# Altium PCB PCB1.PcbDoc (part 3 of 3)
Units mm, origin at the board's own origin, x right, y up, seen from the top; angles counter-clockwise.
Board outline 21.72 x 226.57 mm, 2 copper layers (Top Layer, Bottom Layer); 37 components, 26 nets, 124 pads, 11 vias.
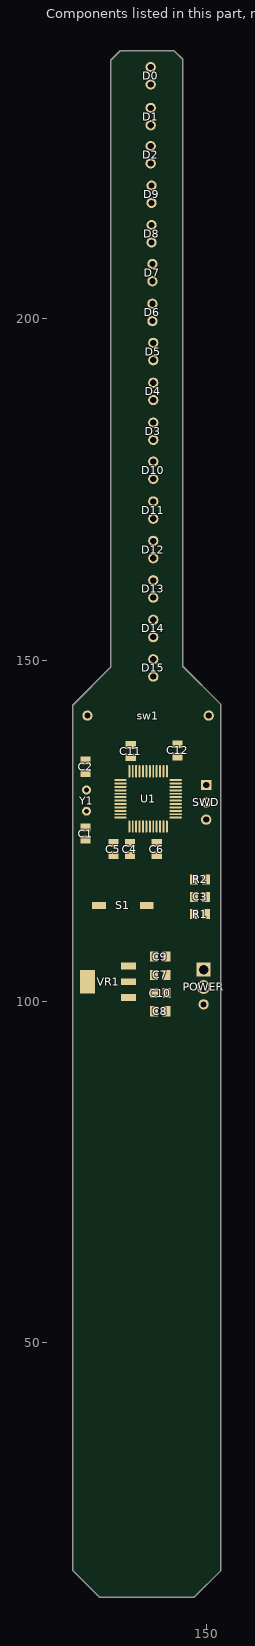
[diagram p3: the components of this part, seen from the top]

## Via types
v1: diameter 0.508, hole 0.305, Top Layer to Bottom Layer, 11 vias

## Nets (pads, with @x,y where several pads share a name; then routed paths per layer and width w, separated by ;. In a path a pad name is that pad's centre, name@x,y a point inside that pad or via, vN(x,y) a via of type N, cw(c..) or ccw(c..) an arc to the next point about the centre after c; other vN are vias at no path point) (continued)
copper on no net: (continued)
  Top Layer w0.076: 143.307,61.595 143.459,61.595 ; 143.307,61.671 143.459,61.671 ; 143.307,61.747 143.383,61.747 ; 143.307,61.824 143.383,61.824 ; 143.307,62.357 143.459,62.357 ; 143.307,62.433 143.459,62.433 ; 143.307,72.796 143.459,72.796 ; 143.307,79.654 143.612,79.654 ; 143.307,81.255 143.612,81.255 ; 143.307,81.483 143.459,81.483 ; 143.307,81.559 143.459,81.559 ; 143.307,81.636 143.688,81.636 ; 143.307,81.712 143.383,81.712 ; 143.307,81.788 143.383,81.788 ; 143.307,81.94 143.459,81.94 ; 143.307,82.55 143.916,82.55 ; 143.383,59.461 143.688,59.461 ; 143.383,61.443 143.459,61.443 ; 143.383,61.519 143.459,61.519 ; 143.383,62.509 143.459,62.509 ; 143.383,62.586 143.535,62.586 ; 143.383,67.767 144.374,67.767 ; 143.383,80.797 143.612,80.797 ; 143.459,58.699 143.688,58.699 ; 143.459,58.776 143.764,58.776 ; 143.459,59.309 143.764,59.309 ; 143.459,59.385 143.764,59.385 ; 143.459,61.214 143.612,61.214 ; 143.459,61.29 143.612,61.29 ; 143.459,61.366 143.535,61.366 ; 143.459,62.662 143.764,62.662 ; 143.459,62.738 143.764,62.738 ; 143.459,67.843 144.374,67.843 ; 143.459,79.731 143.688,79.731 ; 143.459,79.959 143.916,79.959 ; 143.459,81.331 143.612,81.331 ; 143.459,81.407 143.688,81.407 ; 143.459,81.712 143.612,81.712 ; 143.459,81.788 143.612,81.788 ; 143.459,81.864 143.612,81.864 ; 143.459,82.245 143.612,82.245 ; 143.459,84.074 143.688,84.074 ; 143.535,58.852 144.297,58.852 ; 143.535,59.157 143.916,59.157 ; 143.535,59.233 143.993,59.233 ; 143.535,61.138 143.612,61.138 ; 143.535,62.814 143.764,62.814 ; 143.535,67.92 144.45,67.92 ; 143.535,80.874 143.916,80.874 ; 143.535,81.483 143.916,81.483 ; 143.535,81.559 143.916,81.559 ; 143.612,58.928 144.983,58.928 ; 143.612,59.004 143.84,59.004 ; 143.612,59.08 143.84,59.08 ; 143.612,60.909 143.84,60.909 ; 143.612,60.985 143.764,60.985 ; 143.612,61.062 143.764,61.062 ; 143.612,62.357 143.764,62.357 ; 143.612,62.433 143.764,62.433 ; 143.612,62.509 143.764,62.509 ; 143.612,62.586 143.764,62.586 ; 143.612,62.89 143.764,62.89 ; 143.612,62.967 143.764,62.967 ; 143.612,63.043 143.764,63.043 ; 143.612,67.996 144.45,67.996 ; 143.612,78.892 143.84,78.892 ; 143.612,79.807 143.764,79.807 ; 143.612,79.883 143.764,79.883 ; 143.612,80.95 143.916,80.95 ; 143.612,82.093 143.764,82.093 ; 143.612,82.169 143.764,82.169 ; 143.688,60.833 143.916,60.833 ; 143.688,62.205 143.84,62.205 ; 143.688,62.281 143.84,62.281 ; 143.688,63.119 143.916,63.119 ; 143.688,68.072 144.526,68.072 ; 143.688,68.148 144.526,68.148 ; 143.688,78.969 143.916,78.969 ; 143.688,80.112 143.993,80.112 ; 143.688,81.026 144.069,81.026 ; 143.688,81.102 143.84,81.102 ; 143.688,83.998 143.916,83.998 ; 143.764,60.757 143.993,60.757 ; 143.764,61.976 143.916,61.976 ; 143.764,62.052 143.916,62.052 ; 143.764,62.128 143.84,62.128 ; 143.764,63.195 143.916,63.195 ; 143.764,68.224 144.526,68.224 ; 143.764,68.301 144.526,68.301 ; 143.764,68.377 144.602,68.377 ; 143.764,68.453 144.602,68.453 ; 143.764,81.178 143.84,81.178 ; 143.764,81.255 143.916,81.255 ; 143.764,81.331 143.916,81.331 ; 143.764,81.407 143.916,81.407 ; 143.764,81.636 143.84,81.636 ; 143.764,81.712 143.84,81.712 ; 143.764,81.788 143.84,81.788 ; 143.764,81.864 143.84,81.864 ; 143.764,81.94 143.84,81.94 ; 143.764,82.017 143.84,82.017 ; 143.764,82.474 144.069,82.474 ; 143.764,83.388 144.755,83.388 ; 143.764,83.922 143.916,83.922 ; 143.84,60.681 143.993,60.681 ; 143.84,61.9 143.916,61.9 ; 143.84,63.271 144.221,63.271 ; 143.84,68.529 144.678,68.529 ; 143.84,68.605 144.678,68.605 ; 143.84,72.492 143.916,72.492 ; 143.84,80.188 144.069,80.188 ; 143.84,83.312 143.993,83.312 ; 143.916,59.309 144.145,59.309 ; 143.916,60.604 144.069,60.604 ; 143.916,61.671 144.069,61.671 ; 143.916,61.747 143.993,61.747 ; 143.916,61.824 143.993,61.824 ; 143.916,63.348 144.221,63.348 ; 143.916,63.424 144.221,63.424 ; 143.916,68.682 144.755,68.682 ; 143.916,68.758 144.755,68.758 ; 143.916,72.034 144.526,72.034 ; 143.916,72.111 144.526,72.111 ; 143.916,72.187 144.374,72.187 ; 143.916,72.263 144.297,72.263 ; 143.916,72.339 144.145,72.339 ; 143.916,72.415 144.069,72.415 ; 143.916,79.045 144.069,79.045 ; 143.916,82.398 144.145,82.398 ; 143.916,83.236 144.069,83.236 ; 143.916,83.769 144.221,83.769 ; 143.916,83.845 144.145,83.845 ; 143.993,60.528 144.145,60.528 ; 143.993,61.595 144.069,61.595 ; 143.993,63.5 144.221,63.5 ; 143.993,68.834 144.755,68.834 ; 143.993,68.91 144.831,68.91 ; 143.993,71.882 144.678,71.882 ; 143.993,71.958 144.602,71.958 ; 143.993,79.654 144.221,79.654 ; 143.993,80.264 144.145,80.264 ; 143.993,80.34 144.145,80.34 ; 143.993,81.102 144.069,81.102 ; 143.993,83.16 144.069,83.16 ; 144.069,59.385 144.221,59.385 ; 144.069,60.452 144.297,60.452 ; 144.069,61.443 144.221,61.443 ; 144.069,61.519 144.221,61.519 ; 144.069,63.195 144.297,63.195 ; 144.069,63.576 144.297,63.576 ; 144.069,68.986 144.831,68.986 ; 144.069,69.063 144.831,69.063 ; 144.069,69.139 144.831,69.139 ; 144.069,71.73 144.755,71.73 ; 144.069,71.806 144.678,71.806 ; 144.069,79.121 144.145,79.121 ; 144.069,79.731 144.297,79.731 ; 144.069,80.416 144.221,80.416 ; 144.069,82.321 144.221,82.321 ; 144.069,83.083 144.221,83.083 ; 144.069,83.617 144.374,83.617 ; 144.069,83.693 144.374,83.693 ; 144.145,60.376 144.374,60.376 ; 144.145,63.043 144.374,63.043 ; 144.145,63.119 144.297,63.119 ; 144.145,63.652 144.374,63.652 ; 144.145,69.215 144.831,69.215 ; 144.145,69.291 144.831,69.291 ; 144.145,71.653 144.755,71.653 ; 144.145,80.493 144.221,80.493 ; 144.145,81.178 144.221,81.178 ; 144.145,82.245 144.221,82.245 ; 144.145,83.007 144.221,83.007 ; 144.221,59.461 144.374,59.461 ; 144.221,61.29 144.526,61.29 ; 144.221,61.366 144.45,61.366 ; 144.221,62.814 144.45,62.814 ; 144.221,62.89 144.374,62.89 ; 144.221,62.967 144.374,62.967 ; 144.221,63.729 144.45,63.729 ; 144.221,69.367 144.831,69.367 ; 144.221,69.444 144.831,69.444 ; 144.221,69.52 144.831,69.52 ; 144.221,71.425 144.831,71.425 ; 144.221,71.501 144.831,71.501 ; 144.221,71.577 144.831,71.577 ; 144.221,79.197 144.297,79.197 ; 144.221,79.273 144.374,79.273 ; 144.221,79.807 144.526,79.807 ; 144.221,80.569 144.297,80.569 ; 144.221,80.645 144.374,80.645 ; 144.221,81.331 144.297,81.331 ; 144.221,82.093 144.45,82.093 ; 144.221,82.169 144.374,82.169 ; 144.221,82.931 144.374,82.931 ; 144.297,59.538 144.374,59.538 ; 144.297,60.3 144.526,60.3 ; 144.297,63.805 144.526,63.805 ; 144.297,69.596 144.831,69.596 ; 144.297,69.672 144.831,69.672 ; 144.297,71.272 144.983,71.272 ; 144.297,71.349 144.907,71.349 ; 144.297,79.883 144.602,79.883 ; 144.297,80.721 144.374,80.721 ; 144.297,81.407 144.374,81.407 ; 144.297,82.855 144.374,82.855 ; 144.297,83.312 144.831,83.312 ; 144.297,83.541 144.526,83.541 ; 144.374,59.614 144.602,59.614 ; 144.374,60.223 144.526,60.223 ; 144.374,61.214 144.755,61.214 ; 144.374,62.662 144.602,62.662 ; 144.374,62.738 144.526,62.738 ; 144.374,63.881 144.602,63.881 ; 144.374,63.957 144.831,63.957 ; 144.374,69.748 144.831,69.748 ; 144.374,69.825 144.831,69.825 ; 144.374,69.901 144.907,69.901 ; 144.374,69.977 144.907,69.977 ; 144.374,70.891 145.059,70.891 ; 144.374,70.968 144.983,70.968 ; 144.374,71.044 144.983,71.044 ; 144.374,71.12 144.983,71.12 ; 144.374,71.196 144.983,71.196 ; 144.374,80.797 144.45,80.797 ; 144.374,80.874 144.526,80.874 ; 144.374,80.95 144.526,80.95 ; 144.374,81.483 144.45,81.483 ; 144.374,81.559 144.526,81.559 ; 144.374,81.94 144.526,81.94 ; 144.374,82.017 144.526,82.017 ; 144.374,82.779 144.526,82.779 ; 144.374,83.464 144.602,83.464 ; 144.45,64.033 144.831,64.033 ; 144.45,70.053 144.907,70.053 ; 144.45,70.129 144.983,70.129 ; 144.45,70.206 144.983,70.206 ; 144.45,70.282 144.983,70.282 ; 144.45,70.358 144.983,70.358 ; 144.45,70.434 144.983,70.434 ; 144.45,70.51 144.983,70.51 ; 144.45,70.587 144.983,70.587 ; 144.45,70.663 145.059,70.663 ; 144.45,70.739 145.059,70.739 ; 144.45,70.815 145.059,70.815 ; 144.45,79.35 144.526,79.35 ; 144.45,79.959 144.755,79.959 ; 144.45,81.636 144.831,81.636 ; 144.45,81.712 144.831,81.712 ; 144.45,82.702 144.602,82.702 ; 144.526,59.69 145.517,59.69 ; 144.526,60.071 144.678,60.071 ; 144.526,60.147 144.678,60.147 ; 144.526,61.138 144.831,61.138 ; 144.526,62.509 144.678,62.509 ; 144.526,62.586 144.678,62.586 ; 144.526,64.11 144.831,64.11 ; 144.526,79.426 144.678,79.426 ; 144.526,81.026 144.602,81.026 ; 144.526,81.102 144.602,81.102 ; 144.526,81.178 144.678,81.178 ; 144.526,81.788 144.831,81.788 ; 144.526,81.864 144.831,81.864 ; 144.526,82.626 144.678,82.626 ; 144.602,58.852 144.755,58.852 ; 144.602,64.186 144.831,64.186 ; 144.602,80.035 144.831,80.035 ; 144.602,81.255 144.678,81.255 ; 144.602,81.331 144.755,81.331 ; 144.602,82.55 144.755,82.55 ; 144.678,59.766 145.136,59.766 ; 144.678,59.919 145.059,59.919 ; 144.678,59.995 144.831,59.995 ; 144.678,61.062 144.983,61.062 ; 144.678,62.357 144.831,62.357 ; 144.678,62.433 144.831,62.433 ; 144.678,63.881 144.831,63.881 ; 144.678,64.262 144.831,64.262 ; 144.678,79.502 144.755,79.502 ; 144.678,79.578 144.831,79.578 ; 144.678,81.407 144.755,81.407 ; 144.678,81.483 144.831,81.483 ; 144.678,81.559 144.831,81.559 ; 144.678,82.474 144.831,82.474 ; 144.755,59.842 144.983,59.842 ; 144.755,60.985 144.983,60.985 ; 144.755,63.729 144.907,63.729 ; 144.755,63.805 144.831,63.805 ; 144.755,64.338 144.831,64.338 ; 144.755,80.112 144.907,80.112 ; 144.755,81.94 144.831,81.94 ; 144.755,82.017 144.831,82.017 ; 144.755,82.398 144.831,82.398 ; 144.755,83.236 144.983,83.236 ; 144.831,62.281 144.983,62.281 ; 144.831,63.576 144.983,63.576 ; 144.831,63.652 144.983,63.652 ; 144.831,64.414 144.983,64.414 ; 144.831,64.491 144.983,64.491 ; 144.831,79.654 144.907,79.654 ; 144.831,79.731 144.983,79.731 ; 144.831,80.188 144.983,80.188 ; 144.831,82.093 144.907,82.093 ; 144.831,82.169 145.059,82.169 ; 144.831,82.245 144.983,82.245 ; 144.831,82.321 144.983,82.321 ; 144.831,83.16 145.059,83.16 ; 144.907,59.995 145.136,59.995 ; 144.907,60.909 145.059,60.909 ; 144.907,62.205 145.136,62.205 ; 144.907,63.5 145.059,63.5 ; 144.907,64.567 145.288,64.567 ; 144.907,80.264 145.059,80.264 ; 144.983,59.004 145.288,59.004 ; 144.983,60.071 145.212,60.071 ; 144.983,60.147 145.288,60.147 ; 144.983,60.833 145.136,60.833 ; 144.983,63.424 145.136,63.424 ; 144.983,64.643 145.288,64.643 ; 144.983,79.807 145.059,79.807 ; 144.983,79.883 145.136,79.883 ; 144.983,80.34 145.136,80.34 ; 144.983,80.416 145.136,80.416 ; 144.983,82.093 145.136,82.093 ; 144.983,83.083 145.212,83.083 ; 145.059,60.757 145.212,60.757 ; 145.059,63.348 145.288,63.348 ; 145.059,80.493 145.136,80.493 ; 145.059,81.94 145.136,81.94 ; 145.059,82.017 145.136,82.017 ; 145.059,83.007 145.288,83.007 ; 145.136,59.08 145.44,59.08 ; 145.136,60.223 145.517,60.223 ; 145.136,60.3 145.669,60.3 ; 145.136,60.376 145.364,60.376 ; 145.136,60.452 145.364,60.452 ; 145.136,60.528 145.44,60.528 ; 145.136,60.604 145.44,60.604 ; 145.136,60.681 145.44,60.681 ; 145.136,62.128 145.288,62.128 ; 145.136,63.271 145.288,63.271 ; 145.136,64.719 145.364,64.719 ; 145.136,79.959 145.288,79.959 ; 145.136,80.035 145.288,80.035 ; 145.136,80.569 145.212,80.569 ; 145.136,80.645 145.288,80.645 ; 145.136,80.721 145.288,80.721 ; 145.136,80.797 145.288,80.797 ; 145.136,80.874 145.288,80.874 ; 145.136,80.95 145.288,80.95 ; 145.136,81.026 145.288,81.026 ; 145.136,81.102 145.288,81.102 ; 145.136,81.178 145.364,81.178 ; 145.136,81.636 145.288,81.636 ; 145.136,81.712 145.288,81.712 ; 145.136,81.788 145.212,81.788 ; 145.136,81.864 145.212,81.864 ; 145.212,64.491 145.364,64.491 ; 145.212,64.795 145.44,64.795 ; 145.212,81.255 145.593,81.255 ; 145.212,81.331 145.593,81.331 ; 145.212,81.407 145.517,81.407 ; 145.212,81.483 145.517,81.483 ; 145.212,81.559 145.517,81.559 ; 145.212,82.931 145.364,82.931 ; 145.288,59.157 145.669,59.157 ; 145.288,60.757 145.44,60.757 ; 145.288,60.833 145.593,60.833 ; 145.288,62.052 145.44,62.052 ; 145.288,63.195 145.44,63.195 ; 145.288,64.338 145.44,64.338 ; 145.288,64.414 145.364,64.414 ; 145.288,64.872 145.44,64.872 ; 145.288,64.948 145.517,64.948 ; 145.288,80.112 145.44,80.112 ; 145.288,80.188 145.44,80.188 ; 145.288,82.855 145.44,82.855 ; 145.364,59.766 146.05,59.766 ; 145.364,60.909 145.593,60.909 ; 145.364,63.119 145.593,63.119 ; 145.364,64.262 145.44,64.262 ; 145.364,65.024 145.745,65.024 ; 145.364,65.1 145.745,65.1 ; 145.364,82.779 145.44,82.779 ; 145.44,59.233 145.745,59.233 ; 145.44,60.376 146.05,60.376 ; 145.44,60.985 145.745,60.985 ; 145.44,61.062 145.821,61.062 ; 145.44,61.976 145.593,61.976 ; 145.44,64.11 145.593,64.11 ; 145.44,64.186 145.593,64.186 ; 145.44,65.176 145.974,65.176 ; 145.44,65.253 145.898,65.253 ; 145.44,65.329 145.821,65.329 ; 145.44,65.405 145.745,65.405 ; 145.44,65.481 145.669,65.481 ; 145.44,65.557 145.593,65.557 ; 145.44,65.634 145.517,65.634 ; 145.44,65.71 145.517,65.71 ; 145.44,80.264 145.517,80.264 ; 145.44,80.34 145.593,80.34 ; 145.44,80.416 145.593,80.416 ; 145.44,81.178 145.593,81.178 ; 145.44,81.636 145.517,81.636 ; 145.44,81.712 145.517,81.712 ; 145.44,81.788 145.517,81.788 ; 145.44,81.864 145.593,81.864 ; 145.44,81.94 145.593,81.94 ; 145.44,82.017 145.593,82.017 ; 145.44,82.093 145.593,82.093 ; 145.44,82.169 145.593,82.169 ; 145.44,82.245 145.593,82.245 ; 145.44,82.321 145.593,82.321 ; 145.44,82.398 145.593,82.398 ; 145.44,82.474 145.593,82.474 ; 145.44,82.55 145.593,82.55 ; 145.44,82.626 145.517,82.626 ; 145.44,82.702 145.517,82.702 ; 145.517,61.9 145.669,61.9 ; 145.517,63.043 145.745,63.043 ; 145.517,64.033 145.669,64.033 ; 145.517,80.493 145.593,80.493 ; 145.517,80.569 145.593,80.569 ; 145.517,80.645 145.593,80.645 ; 145.517,81.026 145.669,81.026 ; 145.517,81.102 145.593,81.102 ; 145.593,59.309 145.974,59.309 ; 145.593,61.138 145.745,61.138 ; 145.593,61.214 145.745,61.214 ; 145.593,61.29 145.745,61.29 ; 145.593,61.824 145.745,61.824 ; 145.593,62.89 146.126,62.89 ; 145.593,62.967 145.745,62.967 ; 145.593,63.805 145.974,63.805 ; 145.593,63.881 145.974,63.881 ; 145.593,63.957 145.974,63.957 ; 145.593,64.795 145.745,64.795 ; 145.593,64.872 145.745,64.872 ; 145.593,64.948 145.745,64.948 ; 145.593,80.721 145.669,80.721 ; 145.593,80.797 145.669,80.797 ; 145.593,80.874 145.669,80.874 ; 145.593,80.95 145.669,80.95 ; 145.669,59.842 146.202,59.842 ; 145.669,61.366 145.821,61.366 ; 145.669,61.747 145.745,61.747 ; 145.669,62.814 146.126,62.814 ; 145.669,63.729 145.974,63.729 ; 145.669,64.491 145.898,64.491 ; 145.669,64.567 145.898,64.567 ; 145.669,64.643 145.821,64.643 ; 145.669,64.719 145.821,64.719 ; 145.745,59.385 146.05,59.385 ; 145.745,60.452 146.202,60.452 ; 145.745,61.443 145.898,61.443 ; 145.745,61.519 145.974,61.519 ; 145.745,61.595 146.126,61.595 ; 145.745,61.671 146.202,61.671 ; 145.745,62.586 146.05,62.586 ; 145.745,62.662 146.05,62.662 ; 145.745,62.738 146.05,62.738 ; 145.745,63.271 146.202,63.271 ; 145.745,63.348 146.202,63.348 ; 145.745,63.424 145.974,63.424 ; 145.745,63.5 145.974,63.5 ; 145.745,63.576 145.974,63.576 ; 145.745,63.652 145.974,63.652 ; 145.745,64.033 145.974,64.033 ; 145.745,64.11 145.974,64.11 ; 145.745,64.186 145.898,64.186 ; 145.745,64.262 145.898,64.262 ; 145.745,64.338 145.898,64.338 ; 145.745,64.414 145.898,64.414 ; 145.821,61.747 145.974,61.747 ; 145.821,61.824 145.974,61.824 ; 145.821,61.9 145.974,61.9 ; 145.821,61.976 145.974,61.976 ; 145.821,62.357 146.202,62.357 ; 145.821,62.433 146.202,62.433 ; 145.821,62.509 146.05,62.509 ; 145.821,62.967 146.126,62.967 ; 145.821,63.043 146.202,63.043 ; 145.821,63.119 146.202,63.119 ; 145.821,63.195 146.202,63.195 ; 145.821,65.1 146.05,65.1 ; 145.898,59.461 146.279,59.461 ; 145.898,61.138 146.202,61.138 ; 145.898,62.052 146.05,62.052 ; 145.898,62.128 146.05,62.128 ; 145.898,62.205 146.05,62.205 ; 145.898,62.281 146.126,62.281 ; 145.898,64.948 146.126,64.948 ; 145.898,65.024 146.05,65.024 ; 145.974,61.214 146.279,61.214 ; 145.974,64.872 146.126,64.872 ; 146.05,59.538 146.355,59.538 ; 146.05,59.919 146.355,59.919 ; 146.05,64.719 146.202,64.719 ; 146.05,64.795 146.202,64.795 ; 146.126,60.528 146.507,60.528 ; 146.126,62.509 146.355,62.509 ; 146.126,63.424 146.279,63.424 ; 146.126,63.5 146.279,63.5 ; 146.126,64.567 146.355,64.567 ; 146.126,64.643 146.279,64.643 ; 146.202,59.995 146.507,59.995 ; 146.202,61.29 146.431,61.29 ; 146.202,61.747 146.431,61.747 ; 146.202,62.586 146.355,62.586 ; 146.202,62.662 146.355,62.662 ; 146.202,63.576 146.355,63.576 ; 146.202,63.652 146.355,63.652 ; 146.202,63.729 146.355,63.729 ; 146.202,63.805 146.355,63.805 ; 146.202,64.262 146.507,64.262 ; 146.202,64.338 146.431,64.338 ; 146.202,64.414 146.355,64.414 ; 146.202,64.491 146.355,64.491 ; 146.279,59.614 146.507,59.614 ; 146.279,61.366 146.507,61.366 ; 146.279,61.824 146.507,61.824 ; 146.279,62.738 146.431,62.738 ; 146.279,63.881 146.431,63.881 ; 146.279,63.957 146.431,63.957 ; 146.279,64.033 146.431,64.033 ; 146.279,64.11 146.66,64.11 ; 146.279,64.186 146.66,64.186 ; 146.355,59.69 146.583,59.69 ; 146.355,60.071 146.66,60.071 ; 146.355,60.604 146.583,60.604 ; 146.355,62.814 146.507,62.814 ; 146.431,60.147 146.66,60.147 ; 146.431,62.89 146.583,62.89 ; 146.507,59.766 146.66,59.766 ; 146.507,60.681 146.736,60.681 ; 146.507,61.443 146.736,61.443 ; 146.507,61.519 146.812,61.519 ; 146.507,61.9 146.66,61.9 ; 146.507,61.976 146.66,61.976 ; 146.507,62.967 146.66,62.967 ; 146.507,64.033 146.736,64.033 ; 146.583,59.842 146.736,59.842 ; 146.583,60.223 146.812,60.223 ; 146.583,60.757 146.812,60.757 ; 146.583,63.043 146.66,63.043 ; 146.583,63.881 146.812,63.881 ; 146.583,63.957 146.736,63.957 ; 146.66,59.919 146.812,59.919 ; 146.66,60.3 146.964,60.3 ; 146.66,60.833 146.888,60.833 ; 146.66,61.595 146.964,61.595 ; 146.66,62.052 146.812,62.052 ; 146.66,63.119 146.736,63.119 ; 146.66,63.195 146.812,63.195 ; 146.66,63.271 146.812,63.271 ; 146.66,63.348 146.812,63.348 ; 146.66,63.424 146.888,63.424 ; 146.66,63.5 147.193,63.5 ; 146.66,63.576 147.117,63.576 ; 146.66,63.652 147.041,63.652 ; 146.66,63.729 146.888,63.729 ; 146.66,63.805 146.812,63.805 ; 146.736,59.995 146.812,59.995 ; 146.736,62.128 146.888,62.128 ; 146.812,60.071 146.888,60.071 ; 146.812,60.147 146.888,60.147 ; 146.812,60.376 147.041,60.376 ; 146.812,60.452 147.041,60.452 ; 146.812,60.909 146.964,60.909 ; 146.812,61.671 146.964,61.671 ; 146.812,62.205 146.964,62.205 ; 146.812,62.281 147.041,62.281 ; 146.888,60.223 146.964,60.223 ; 146.888,60.985 147.117,60.985 ; 146.888,61.747 147.117,61.747 ; 146.964,60.528 147.117,60.528 ; 146.964,60.604 147.193,60.604 ; 146.964,61.062 147.422,61.062 ; 146.964,61.824 147.269,61.824 ; 146.964,62.357 147.117,62.357 ; 146.964,62.433 147.117,62.433 ; 147.041,60.681 147.269,60.681 ; 147.041,61.9 147.498,61.9 ; 147.041,63.424 147.193,63.424 ; 147.117,60.757 147.269,60.757 ; 147.117,60.833 147.345,60.833 ; 147.117,61.138 147.422,61.138 ; 147.117,61.214 147.422,61.214 ; 147.117,61.976 147.498,61.976 ; 147.117,62.509 147.193,62.509 ; 147.117,62.586 147.269,62.586 ; 147.117,63.195 147.269,63.195 ; 147.117,63.271 147.269,63.271 ; 147.117,63.348 147.269,63.348 ; 147.193,60.909 147.422,60.909 ; 147.193,60.985 147.422,60.985 ; 147.193,62.662 147.422,62.662 ; 147.193,62.738 147.422,62.738 ; 147.193,62.814 147.345,62.814 ; 147.193,62.89 147.269,62.89 ; 147.193,62.967 147.269,62.967 ; 147.193,63.043 147.269,63.043 ; 147.193,63.119 147.269,63.119 ; 147.269,61.29 147.422,61.29 ; 147.269,61.366 147.498,61.366 ; 147.269,62.052 147.498,62.052 ; 147.269,62.128 147.498,62.128 ; 147.345,61.443 147.498,61.443 ; 147.345,61.519 147.574,61.519 ; 147.345,61.747 147.498,61.747 ; 147.345,61.824 147.498,61.824 ; 147.345,62.509 147.498,62.509 ; 147.345,62.586 147.422,62.586 ; 147.422,61.595 147.574,61.595 ; 147.422,61.671 147.574,61.671 ; 147.422,62.205 147.498,62.205 ; 147.422,62.281 147.498,62.281 ; 147.422,62.357 147.498,62.357 ; 147.422,62.433 147.498,62.433

## Polygon pours and split planes (outlines as drawn)
GND on Bottom Layer "Bottom Layer-No Net" (solid, remove dead copper, pour order 12): 137.414,239.268 136.017,237.871 136.017,148.971 130.429,143.383 130.429,16.637 134.239,12.827 148.209,12.827 152.146,16.764 152.146,143.383 146.558,148.971 146.558,237.871 145.161,239.268
GND on Top Layer "Bottom Layer-No Net" (solid, remove dead copper, pour order 4): 137.414,239.268 136.017,237.871 136.017,148.971 130.429,143.383 130.429,16.637 134.366,12.7 148.209,12.7 152.273,16.764 152.146,16.891 152.146,143.383 146.558,148.971 146.558,237.871 145.161,239.268

## Other copper
Bottom Layer:
  text "Designed by ZZS in WeiHai" at 150.749,16.002 h1.98
  text "Assembled in China" at 147.955,14.097 h2.03

## Silkscreen, mask and mechanical layers (free items; w line width, h text height)
Bottom Solder:
  lines w0.254: 130.429,16.637 134.366,12.7 148.082,12.7 152.273,16.891 152.273,143.256 146.558,148.971 146.558,237.871 145.161,239.268 137.414,239.268 136.017,237.871 136.017,148.971 130.429,143.383 130.429,16.637